# EAGLE board pavement_painter_v4 (EAGLE 9.1.3)
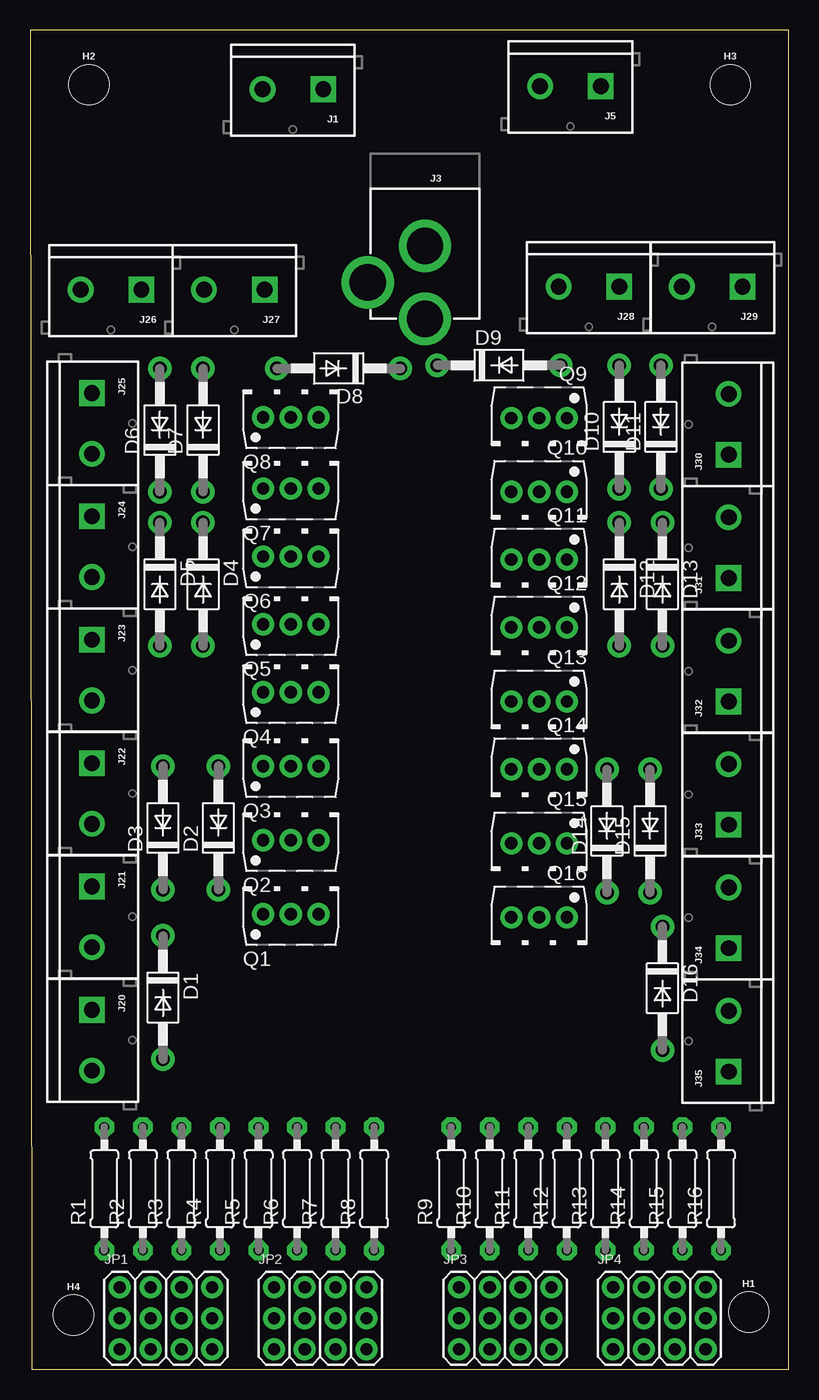
[diagram p0: board, top side]
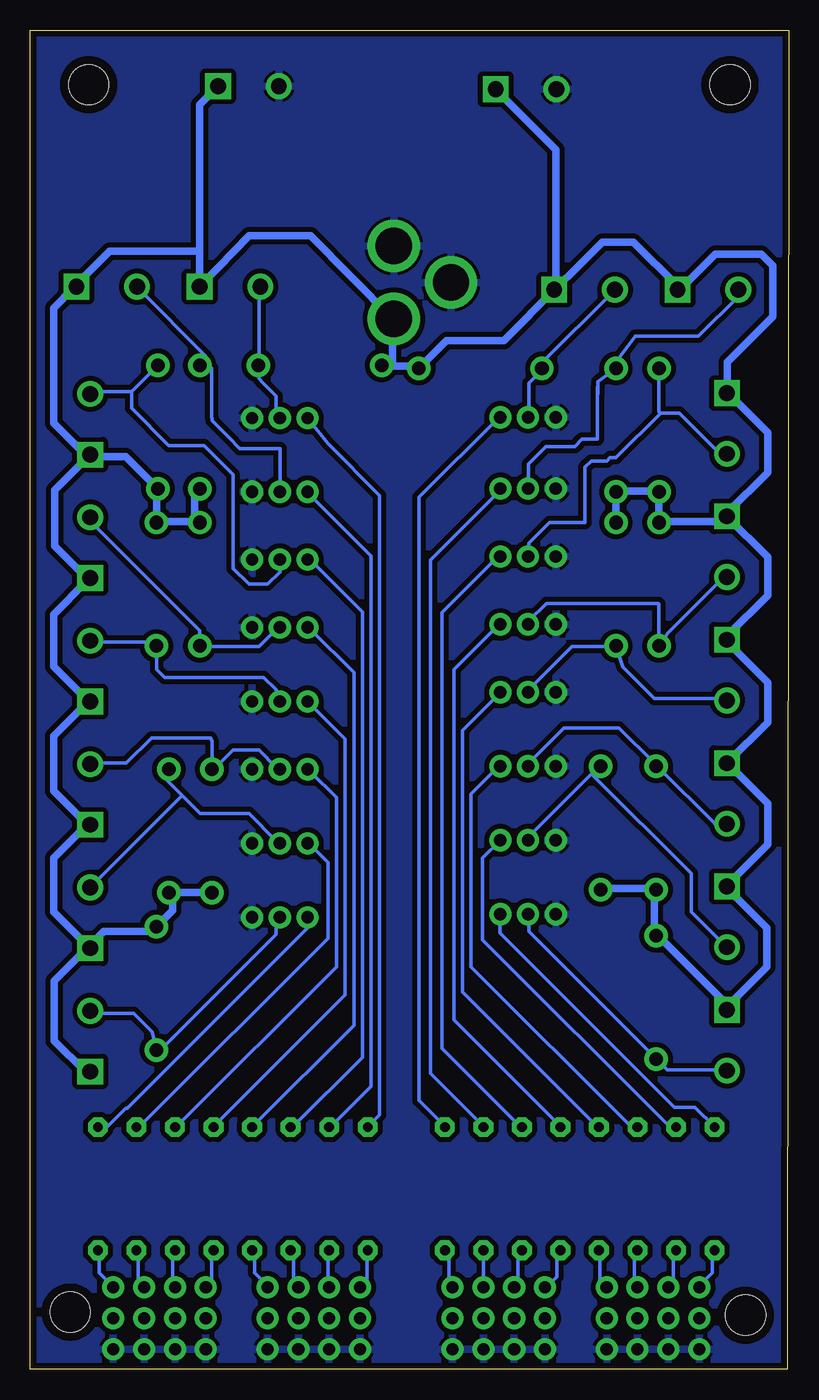
[diagram p1: board, bottom side, seen from below]

Size 62.46 x 110.26 mm. Coordinates in mm from the lower left corner, seen from the top.
Outline: 0.13,0 62.46,0 62.46,110.26 0.64,110.26 0.38,110.26 0,110.26 0,110.11 0.13,0
Copper layers (1*16): Top 0.035mm / dielectric 1.5mm / Bottom 0.035mm
Design rules "pavement *": minimum track width 12mil, minimum drill 0.35mm, track to track 16mil, track to pad 16mil, pad to pad 16mil, via to via 16mil, smd to smd 6mil, copper to edge 20mil, drill to drill 10mil, minimum pad ring 16mil, minimum via ring 8mil, stop-mask expansion 4mil, vias tented up to drill 0mil, thermal gap 10mil

## Footprints (pad centres in the part's own frame; a part is rotated, then mirrored left to right if it is on the bottom)
DO41-10 = drill 1.118 pad 1.93: A 5.08,0; C -5.08,0
STAND-OFF = hole 3.302: 0,0
SCREWTERMINAL-5MM-2-400MIL = drill 1.3 pad 2.032 square: 1 0,0.381 | drill 1.3 pad 2.032: 2 5,0.381
POWER_JACK_PTH = drill 2.997 pad 4.318: GND 0,7.7; GNDBREAK 4.7,10.7; PWR 0,13.7
3X04 = drill 1 pad 1.778: 1 -3.81,-2.54; 2 -3.81,0; 3 -3.81,2.54; 4 -1.27,-2.54; 5 -1.27,0; 6 -1.27,2.54; 7 1.27,-2.54; 8 1.27,0; 9 1.27,2.54; 10 3.81,-2.54; 11 3.81,0; 12 3.81,2.54
BD679V = drill 1.016 pad 1.778: B 2.286,-0.254; C 0,-0.254; E -2.286,-0.254
0207/10 = drill 0.813 octagon: 1 -5.08,0; 2 5.08,0

## Placement (x,y rotation side)
D1  1N4004  [DO41-10]  10.92,30.61 270 top
D2  1N4004  [DO41-10]  15.49,44.58 90 top
D3  1N4004  [DO41-10]  10.92,44.58 90 top
D4  1N4004  [DO41-10]  14.22,64.64 270 top
D5  1N4004  [DO41-10]  10.67,64.64 270 top
D6  1N4004  [DO41-10]  10.67,77.34 90 top
D7  1N4004  [DO41-10]  14.22,77.34 90 top
D8  1N4004  [DO41-10]  25.4,82.42 180 top
D9  1N4004  [DO41-10]  38.61,82.68 0 top
D10  1N4004  [DO41-10]  48.51,77.6 90 top
D11  1N4004  [DO41-10]  51.94,77.6 90 top
D12  1N4004  [DO41-10]  48.51,64.64 270 top
D13  1N4004  [DO41-10]  52.07,64.64 270 top
D14  1N4004  [DO41-10]  47.5,44.32 90 top
D15  1N4004  [DO41-10]  51.05,44.32 90 top
D16  1N4004  [DO41-10]  52.07,31.37 270 top
FRAME1  FRAME-LETTER  [CREATIVE_COMMONS]  8.13,-8.76 0 top  (outside the outline)
H1  STAND-OFF  [STAND-OFF]  59.18,4.7 0 top
H2  STAND-OFF  [STAND-OFF]  4.83,105.79 0 top
H3  STAND-OFF  [STAND-OFF]  57.66,105.79 0 top
H4  STAND-OFF  [STAND-OFF]  3.56,4.44 0 top
J1  [SCREWTERMINAL-5MM-2-400MIL]  24.13,105.79 180 top
J3  POWER_JACK  [POWER_JACK_PTH]  32.51,100.2 180 top
J5  [SCREWTERMINAL-5MM-2-400MIL]  46.99,106.05 180 top
J20  [SCREWTERMINAL-5MM-2-400MIL]  4.7,29.59 270 top
J21  [SCREWTERMINAL-5MM-2-400MIL]  4.7,39.75 270 top
J22  [SCREWTERMINAL-5MM-2-400MIL]  4.7,49.91 270 top
J23  [SCREWTERMINAL-5MM-2-400MIL]  4.7,60.07 270 top
J24  [SCREWTERMINAL-5MM-2-400MIL]  4.7,70.23 270 top
J25  [SCREWTERMINAL-5MM-2-400MIL]  4.7,80.39 270 top
J26  [SCREWTERMINAL-5MM-2-400MIL]  9.14,89.28 180 top
J27  [SCREWTERMINAL-5MM-2-400MIL]  19.3,89.28 180 top
J28  [SCREWTERMINAL-5MM-2-400MIL]  48.51,89.53 180 top
J29  [SCREWTERMINAL-5MM-2-400MIL]  58.67,89.53 180 top
J30  [SCREWTERMINAL-5MM-2-400MIL]  57.91,75.31 90 top
J31  [SCREWTERMINAL-5MM-2-400MIL]  57.91,65.15 90 top
J32  [SCREWTERMINAL-5MM-2-400MIL]  57.91,54.99 90 top
J33  [SCREWTERMINAL-5MM-2-400MIL]  57.91,44.83 90 top
J34  [SCREWTERMINAL-5MM-2-400MIL]  57.91,34.67 90 top
J35  [SCREWTERMINAL-5MM-2-400MIL]  57.91,24.51 90 top
JP1  [3X04]  11.18,4.19 0 top
JP2  [3X04]  23.88,4.19 0 top
JP3  [3X04]  39.12,4.19 0 top
JP4  [3X04]  51.82,4.19 0 top
Q1  TIP120  [BD679V]  21.46,37.72 0 top
Q2  TIP120  [BD679V]  21.46,43.82 0 top
Q3  TIP120  [BD679V]  21.46,49.91 0 top
Q4  TIP120  [BD679V]  21.46,56.01 0 top
Q5  TIP120  [BD679V]  21.46,61.6 0 top
Q6  TIP120  [BD679V]  21.46,67.18 0 top
Q7  TIP120  [BD679V]  21.46,72.77 0 top
Q8  TIP120  [BD679V]  21.46,78.65 0 top
Q9  TIP120  [BD679V]  41.91,78.07 180 top
Q10  TIP120  [BD679V]  41.91,72.01 180 top
Q11  TIP120  [BD679V]  41.91,66.42 180 top
Q12  TIP120  [BD679V]  41.91,60.83 180 top
Q13  TIP120  [BD679V]  41.91,54.74 180 top
Q14  TIP120  [BD679V]  41.91,49.15 180 top
Q15  TIP120  [BD679V]  41.91,43.05 180 top
Q16  TIP120  [BD679V]  41.91,36.96 180 top
R1  [0207/10]  6.1,14.86 90 top
R2  [0207/10]  9.27,14.86 90 top
R3  [0207/10]  12.45,14.86 90 top
R4  [0207/10]  15.62,14.86 90 top
R5  [0207/10]  18.8,14.86 90 top
R6  [0207/10]  21.97,14.86 90 top
R7  [0207/10]  25.15,14.86 90 top
R8  [0207/10]  28.32,14.86 90 top
R9  [0207/10]  34.67,14.86 90 top
R10  [0207/10]  37.85,14.86 90 top
R11  [0207/10]  41.02,14.86 90 top
R12  [0207/10]  44.2,14.86 90 top
R13  [0207/10]  47.37,14.86 90 top
R14  [0207/10]  50.55,14.86 90 top
R15  [0207/10]  53.72,14.86 90 top
R16  [0207/10]  56.9,14.86 90 top

## Library data of the parts
D1-D16 = adafruit
FRAME1 = SparkFun-Aesthetics
H1-H4 = SparkFun-Hardware
J1 J5 J20-J35 = SparkFun-Connectors
J3 = SparkFun-Connectors; PROD_ID: CONN-08197
JP1-JP4 = microbuilder
Q1-Q16 = TIP120
R1-R16 = rcl; SPICEPREFIX: R

## Nets
+12V: D1.C D2.C D3.C D4.C D5.C D6.C D7.C D8.C D9.C D10.C D11.C D12.C D13.C D14.C D15.C D16.C J1.1 J3.PWR J5.1 J20.1 J21.1 J22.1 J23.1 J24.1 J25.1 J26.1 J27.1 J28.1 J29.1 J30.1 J31.1 J32.1 J33.1 J34.1 J35.1
GND: J1.2 J3.GND J3.GNDBREAK J5.2 JP1.1 JP1.4 JP1.7 JP1.10 JP2.1 JP2.4 JP2.7 JP2.10 JP3.1 JP3.4 JP3.7 JP3.10 JP4.1 JP4.4 JP4.7 JP4.10 Q1.E Q2.E Q3.E Q4.E Q5.E Q6.E Q7.E Q8.E Q9.E Q10.E Q11.E Q12.E Q13.E Q14.E Q15.E Q16.E
N$1: D2.A J21.2 Q2.C
N$2: Q2.B R2.2
N$3: D1.A J20.2 Q1.C
N$4: Q1.B R1.2
N$5: D3.A J22.2 Q3.C
N$6: Q3.B R3.2
N$7: D4.A J23.2 Q4.C
N$8: Q4.B R4.2
N$9: D5.A J24.2 Q5.C
N$10: Q5.B R5.2
N$11: D6.A J25.2 Q6.C
N$12: Q6.B R6.2
N$13: D7.A J26.2 Q7.C
N$14: Q7.B R7.2
N$15: D8.A J27.2 Q8.C
N$16: Q8.B R8.2
N$17: D9.A J28.2 Q9.C
N$18: Q9.B R9.2
N$19: D10.A J29.2 Q10.C
N$20: Q10.B R10.2
N$21: D11.A J30.2 Q11.C
N$22: Q11.B R11.2
N$23: D12.A J31.2 Q12.C
N$24: Q12.B R12.2
N$25: D13.A J32.2 Q13.C
N$26: Q13.B R13.2
N$27: D14.A J33.2 Q14.C
N$28: Q14.B R14.2
N$29: D15.A J34.2 Q15.C
N$30: Q15.B R15.2
N$31: D16.A J35.2 Q16.C
N$32: Q16.B R16.2
PCA_SOL1: JP1.3 R1.1
PCA_SOL2: JP1.6 R2.1
PCA_SOL3: JP1.9 R3.1
PCA_SOL4: JP1.12 R4.1
PCA_SOL5: JP2.3 R5.1
PCA_SOL6: JP2.6 R6.1
PCA_SOL7: JP2.9 R7.1
PCA_SOL8: JP2.12 R8.1
PCA_SOL9: JP3.3 R9.1
PCA_SOL10: JP3.6 R10.1
PCA_SOL11: JP3.9 R11.1
PCA_SOL12: JP3.12 R12.1
PCA_SOL13: JP4.3 R13.1
PCA_SOL14: JP4.6 R14.1
PCA_SOL15: JP4.9 R15.1
PCA_SOL16: JP4.12 R16.1

## Tracks (layer width: path | path; a pad name or v marks a point on that pad's centre or on a via)
+12V
  Bottom 0.61: 5.74,30.71 5.38,30.35 5.38,29.64 J20.1 | 5.03,49.91 1.73,46.61 1.73,43.21 5.05,39.89 J21.1 5.03,39.6 1.78,36.35 1.78,33.15 4.98,29.95 5.74,30.71 | 5.03,49.91 J22.1 | J24.1 5.03,70.18 1.73,66.88 1.73,63.73 5.03,60.43 5.03,60.22 J23.1 5.03,59.87 1.73,56.57 1.73,53.26 5.03,49.96 5.03,49.91 | J24.1 5.03,70.54 1.73,73.84 1.73,77.14 4.98,80.39 J25.1 5.03,80.49 5.03,82.93 1.29,86.66 1.29,90.88 2.24,91.82 6.04,91.82 8.84,89.03 J26.1 9.14,89.18 12.8,92.84 15.34,92.84 17.37,90.8 19.15,89.03 | 5.74,69.82 5.38,70.18 J24.1 | 48.92,69.99 48.92,72.11 D10.C | 48.92,69.99 D12.C | J30.1 57.51,75.16 54.61,75.16 51.97,72.52 D11.C 52.07,72.39 D13.C 51.92,69.82 48.92,69.82 48.92,69.99 | D14.C 47.55,39.24 50.39,39.24 D15.C 50.75,39.24 50.75,37.77 D16.C 52.61,36.04 56.44,36.04 57.51,34.98 J34.1 | J34.1 57.86,34.62 60.5,31.98 60.5,27.05 57.96,24.51 J35.1 | J34.1 57.86,34.98 60.55,37.67 60.55,42.09 57.81,44.83 J33.1 57.86,44.93 60.55,47.62 60.55,52.15 57.86,54.84 57.86,54.89 J32.1 57.66,54.99 60.55,57.89 60.55,62.15 57.86,64.85 J31.1 57.86,65.2 60.45,67.79 60.45,72.39 J30.1 | 19.15,89.03 J27.1 | 32.61,82.63 33.48,82.63 D9.C | 32.61,82.63 30.63,82.63 D8.C 28.19,84.71 23.47,84.71 19.15,89.03 | 32.61,82.63 32.61,86.18 J3.PWR 32.61,86.54 39.37,93.34 | 39.88,93.34 44.3,93.34 44.45,93.34 48.26,89.38 J28.1 48.51,91.95 | 39.88,93.34 39.62,93.34 | 39.62,93.34 39.37,93.34 | 39.37,93.34 39.88,93.34 | 39.88,93.34 39.37,93.34 | 39.37,93.34 39.42,93.34 40.13,93.34 39.62,93.34 | 48.51,91.95 48.57,92.07 55.93,92.07 58.67,89.33 J29.1 58.93,89.03 60.55,87.4 60.55,77.9 57.96,75.31 J30.1
  Bottom 0.61: D2.C 15.34,39.6 11.07,39.6 D3.C 11.07,39.24 11.07,35.69 D1.C 10.72,35.69 5.74,30.71 | 5.74,69.82 10.46,69.82 D5.C 10.69,69.74 10.69,72.19 D6.C 10.92,72.31 14.07,72.31 D7.C D4.C | 5.74,69.82 J24.1 | J1.1 19.15,100.43 19.15,89.03 | J5.1 48.51,104.14 48.51,91.95
GND
  pour Bottom (isolate 0.406): 0.25,-0.13 0.25,109.85 0.25,110.62 62.74,110.62 62.74,-0.13
N$1
  Bottom 0.305: J21.2 5.38,34.98 5.38,35.03 8.03,37.67 8.03,40.82 16.23,49.02 | 16.23,49.02 17.12,48.13 21.39,43.87 Q2.C | D2.A 15.7,49.55 16.23,49.02
N$2
  Bottom 0.305: Q2.B 25.22,42.09 25.22,36.86 25.21,36.84 25.21,35.37 9.78,19.94 R2.2
N$3
  Bottom 0.305: J20.2 5.38,24.66 10.01,24.66 10.72,25.38 D1.A 11.07,25.73 21.39,36.04 21.39,37.47 Q1.C
N$4
  Bottom 0.305: R1.2 7.72,21.56 9.4,21.56 23.77,35.94 23.77,37.44 Q1.B
N$5
  Bottom 0.305: Q3.C 21.39,49.91 18.49,52.81 13.97,52.81 11.07,49.91 D3.A 10.72,49.55 6.1,44.93 6.1,44.91 J22.2
N$6
  Bottom 0.305: Q3.B 23.88,49.66 26.16,47.37 26.16,33.15 12.95,19.94 R3.2
N$7
  Bottom 0.305: J23.2 5.38,55.25 11.07,55.25 13.64,57.81 D4.A 14.43,59.51 17.83,59.51 21.39,55.96 Q4.C
N$8
  Bottom 0.305: 15.9,20.04 R4.2 15.9,20.04 | Q4.B 23.88,55.6 26.87,52.6 26.87,46.65 26.87,31.07 15.9,20.1 15.9,20.04
N$9
  Bottom 0.305: J24.2 5.38,65.2 9.96,60.63 D5.A 10.67,63.02 10.72,63.07 19.96,63.07 21.39,61.65 Q5.C
N$10
  Bottom 0.305: 19.1,20.04 R5.2 19.1,20.04 | 19.1,20.04 19.1,20.26 27.58,28.75 27.58,57.63 23.88,61.34 Q5.B
N$11
  Bottom 0.305: Q6.C 21.39,66.98 21.39,68.05 19.71,69.72 16.76,69.72 16.76,74.3 16.26,74.8 14.99,74.8 14.73,75.06 14.22,75.06 10.54,78.74 | 10.54,78.74 10.67,78.87 D6.A | 10.54,78.74 9.02,78.74 5.59,75.31 5.16,75.31 J25.2
N$12
  Bottom 0.305: 22.3,20.04 R6.2 22.3,20.04 | 22.3,20.04 22.3,20.17 28.55,26.42 28.55,62.31 23.93,66.93 Q6.B
N$13
  Bottom 0.305: Q7.C 21.44,72.54 21.44,74.55 19.99,76 17.6,76 17.02,76.58 15.75,76.58 15.75,79.38 15.75,80.9 15.75,80.64 15.7,80.29 15.7,81.32 D7.A 14.22,82.93 12.62,85.06 7.42,85.06 4.14,88.34 J26.2
N$14
  Bottom 0.305: R7.2 25.15,20.04 25.2,20.04 29.52,24.36 29.52,37.92 29.52,66.62 23.88,72.26 23.88,72.31 Q7.B
N$15
  Bottom 0.305: J27.2 14.53,88.67 20.32,82.88 D8.A 20.32,82.27 21.39,81.2 21.39,78.71 Q8.C
N$16
  Bottom 0.305: R8.2 28.35,20.04 30.43,22.12 30.43,71.81 23.88,78.36 Q8.B
N$17
  Bottom 0.305: Q9.C 42.21,78.47 42.21,80.14 43.28,81.2 43.64,81.56 43.64,82.63 D9.A 43.64,82.98 43.64,84.05 43.64,89.03 J28.2
N$18
  Bottom 0.305: Q9.B 37.95,76.22 33.68,71.96 33.68,20.93 R9.2
N$19
  Bottom 0.305: J29.2 53.59,89.03 48.01,83.44 D10.A 47.55,82.44 47.55,78.36 47.5,78.31 47.5,78.1 46.1,76.71 45.21,75.82 41.91,75.82 Q10.C
N$20
  Bottom 0.305: R10.2 37.59,20.04 37.59,20.09 34.39,23.29 34.39,66.98 39.37,71.96 Q10.B
N$21
  Bottom 0.305: J30.2 57.51,80.49 54.13,80.49 | Q11.C 41.91,65.66 42.93,64.64 44.45,64.64 45.74,65.94 45.74,73.66 48.16,76.07 51.05,76.07 54.13,79.15 54.13,80.49 | D11.A 54.13,80.49
N$22
  Bottom 0.305: Q11.B 39.37,66.62 35.1,62.36 35.1,25.68 40.84,19.94 R11.2
N$23
  Bottom 0.305: Q12.C 42.21,60.94 43.64,59.51 48.31,59.51 D12.A 48.51,60.83 57.51,69.82 J31.2
N$24
  Bottom 0.305: R12.2 43.99,20.04 43.99,20.14 35.81,28.32 35.81,57.38 39.37,60.94 Q12.B
N$25
  Bottom 0.305: Q13.C 42.21,55.09 42.21,55.96 43.23,56.97 51.41,56.97 52.07,57.63 D13.A 52.27,59.87 57.51,59.87 J32.2
N$26
  Bottom 0.305: R13.2 47.19,20.04 47.19,20.15 36.52,30.82 36.52,51.89 Q13.B
N$27
  Bottom 0.305: Q14.C 42.21,49.55 43.64,50.98 45.77,50.98 47.19,49.55 D14.A 47.5,51.69 47.6,51.99 52.48,51.99 54.56,49.91 57.51,49.91 J33.2
N$28
  Bottom 0.305: Q14.B 39.37,49.2 37.24,47.07 37.24,33.15 50.44,19.94 R14.2
N$29
  Bottom 0.305: Q15.C 42.21,43.51 44.45,45.75 48.46,45.75 49.96,47.24 | D15.A 50.75,49 51.23,48.51 49.96,47.24 | 49.96,47.24 J34.2
N$30
  Bottom 0.305: Q15.B 39.37,43.16 37.95,41.73 37.95,35.47 53.48,19.94 R15.2
N$31
  Bottom 0.305: J35.2 57.51,29.29 53.95,29.29 52.44,27.78 D16.A 51.71,26.29 42.21,35.79 42.21,36.91 Q16.C
N$32
  Bottom 0.305: R16.2 56.13,19.94 54.61,21.46 54.49,21.46 39.62,36.33 Q16.B
PCA_SOL1
  Bottom 0.305: R1.1 6.3,9.73 6.3,7.95 7.37,6.88 JP1.3
PCA_SOL2
  Bottom 0.305: R2.1 9.5,9.73 9.5,7.24 9.86,6.88 JP1.6
PCA_SOL3
  Bottom 0.305: R3.1 12.7,9.73 12.7,6.88 JP1.9
PCA_SOL4
  Bottom 0.305: R4.1 15.54,9.73 15.54,7.24 15.19,6.88 JP1.12
PCA_SOL5
  Bottom 0.305: R5.1 19.1,9.73 19.1,7.59 19.81,6.88 JP2.3
PCA_SOL6
  Bottom 0.305: R6.1 22.3,9.73 22.3,6.88 JP2.6
PCA_SOL7
  Bottom 0.305: R7.1 25.15,9.73 25.15,6.88 JP2.9
PCA_SOL8
  Bottom 0.305: R8.1 27.99,9.73 27.99,6.88 JP2.12
PCA_SOL9
  Bottom 0.305: R9.1 34.75,9.73 34.75,7.24 35.1,6.88 JP3.3
PCA_SOL10
  Bottom 0.305: R10.1 37.95,9.73 37.95,6.88 JP3.6
PCA_SOL11
  Bottom 0.305: R11.1 40.79,9.73 40.79,7.24 40.44,6.88 JP3.9
PCA_SOL12
  Bottom 0.305: R12.1 43.99,9.73 43.99,7.95 42.93,6.88 JP3.12
PCA_SOL13
  Bottom 0.305: R13.1 47.55,9.73 47.55,7.24 47.9,6.88 JP4.3
PCA_SOL14
  Bottom 0.305: R14.1 50.75,9.73 50.75,6.88 JP4.6
PCA_SOL15
  Bottom 0.305: R15.1 53.59,9.73 53.59,7.24 53.24,6.88 JP4.9
PCA_SOL16
  Bottom 0.305: R16.1 56.79,9.73 56.79,7.95 55.73,6.88 JP4.12